# EAGLE board hv_power (EAGLE 6.6.0)
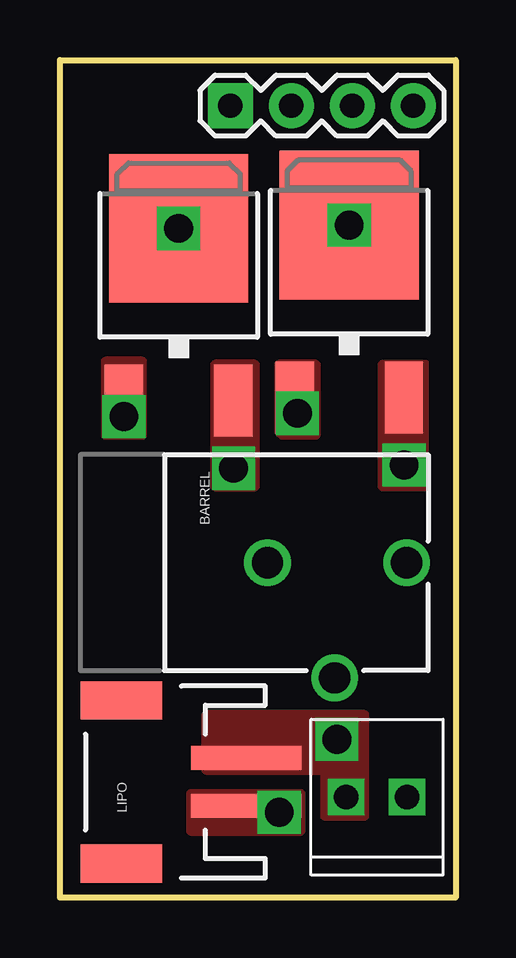
[diagram p0: board, top side]
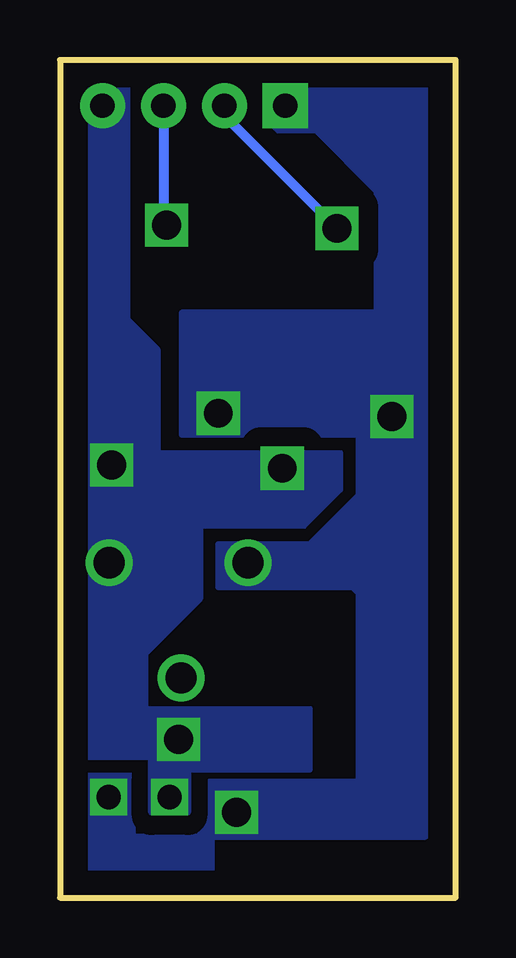
[diagram p1: board, bottom side, seen from below]

Size 16.51 x 34.93 mm. Coordinates in mm from the lower left corner, seen from the top.
Outline: 0,0 0,34.93 16.51,34.93 16.51,0 0,0
Copper layers (1*16): Top 0.035mm / dielectric 1.5mm / Bottom 0.035mm
Design rules "default": minimum track width 10mil, minimum drill 24mil, track to track 8mil, track to pad 8mil, pad to pad 8mil, via to via 8mil, smd to smd 8mil, copper to edge 40mil, drill to drill 8mil, minimum pad ring 10mil, minimum via ring 8mil, stop-mask expansion 4mil, vias tented up to drill 0mil, thermal gap 10mil

## Footprints (pad centres in the part's own frame; a part is rotated, then mirrored left to right if it is on the bottom)
V-REG_DPACK = smd 1.6 x 3: 1 -2.28,-4.8; 3 2.28,-4.8 | smd 5.8 x 6.2: 4 0,2.38
POWER_JACK_PTH_BREAD = drill 1.3: GND 0,7.9; GNDBREAK 4.8,10.7; PWR 0,13.7
JST-2-SMD = smd 1 x 4.6: 1 -1,-3.7; 2 1,-3.7 | smd 1.6 x 3.4: NC1 -3.4,1.5; NC2 3.4,1.5
1X04 = drill 1.016 pad 1.88 square: 1 0,0 | drill 1.016 pad 1.88: 2 2.54,0; 3 5.08,0; 4 7.62,0
1X02_2.54_SCREWTERM = drill 1.016 square: P1 2.54,0; P2 0,0

## Placement (x,y rotation side)
3V3REG  V_REG_317DPACK  [V-REG_DPACK]  4.95,25.53 0 top
5VREG  V_REG_317DPACK  [V-REG_DPACK]  12.07,25.65 0 top
BARREL  POWER_JACKPTH_BREAD  [POWER_JACK_PTH_BREAD]  0.76,13.97 270 top
LIPO  [JST-2-SMD]  4.06,4.83 90 top
OUT  [1X04]  7.11,33.02 0 top
SCREW  M022.54MM_SCREWTERM  [1X02_2.54_SCREWTERM]  14.48,4.19 180 top

## Library data of the parts
3V3REG 5VREG = SparkFun-PowerIC
BARREL = SparkFun-Connectors; PROD_ID: PRT-10811
LIPO = SparkFun-Connectors; PROD_ID: CONN-08352
OUT SCREW = SparkFun-Connectors

## Nets
3V3: 3V3REG.4 OUT.2
5V: 5VREG.4 OUT.3
GND: 3V3REG.1 5VREG.1 BARREL.GND LIPO.1 OUT.1 SCREW.P2
VBAT: 3V3REG.3 5VREG.3 BARREL.PWR LIPO.2 OUT.4 SCREW.P1

## Tracks (layer width: path | path; a pad name or v marks a point on that pad's centre or on a via)
3V3  (via drill 1.2)
  Top 0.406: 3V3REG.4 4.95,27.81 6.35,26.42
  Bottom 0.406: OUT.2 9.65,32.61 3V3REG.4
  other vias: 4.95,27.91
5V  (via drill 1.2)
  Top 0.406: 5VREG.4 12.07,27.18 12.32,26.92
  Bottom 0.406: OUT.3 12.19,28.16 5VREG.4
  other vias: 12.07,28.03
GND  (via drill 1.2)
  other vias: 9.91,20.19 2.67,20.07 9.14,3.56
  pour Top (no thermals): 3.43,22.35 1.9,22.35 1.9,19.3 3.43,19.3
  pour Top (no thermals): 9.14,22.22 9.14,19.43 9.27,19.3 10.67,19.3 10.67,22.22
  pour Top (no thermals): 10.03,4.32 5.46,4.32 5.46,2.79 10.03,2.79
  pour Bottom (isolate 0.813, no thermals): 1.27,2.54 1.27,34.29 8.13,34.29 8.13,32 5.84,32 3.3,29.46 3.3,24.38 11.43,24.38 11.43,19.3 4.06,19.3 4.06,16.76 6.1,14.73 9.91,14.73 9.91,12.95 4.32,12.95 4.06,12.7 4.06,4.83 10.67,4.83 10.67,2.54 13.46,2.54 13.46,5.08 16,5.08 16,0.76 10.16,0.76 10.16,2.54
VBAT  (via drill 1.2)
  other vias: 14.35,18.03 7.24,17.91 11.56,6.6
  pour Top (no thermals): 6.48,22.22 6.48,17.14 8.13,17.14 8.13,22.22
  pour Top (no thermals): 13.46,22.22 15.24,22.22 15.24,17.14 13.46,17.14
  pour Top (no thermals): 12.7,3.43 12.7,7.62 6.1,7.62 6.1,5.33 11.05,5.33 11.05,3.43
  pour Bottom (no thermals): 11.18,3.56 12.7,3.56 12.7,5.84 15.75,5.84 15.75,34.04 13.72,34.04 13.72,24.13 12.45,22.86 12.45,18.54 4.83,18.54 4.83,17.02 6.35,15.49 10.67,15.49 10.67,12.45 12.95,10.16 12.95,7.87 6.1,7.87 6.1,5.33 11.18,5.33